# EAGLE board PIC32board (EAGLE 8.1.0)
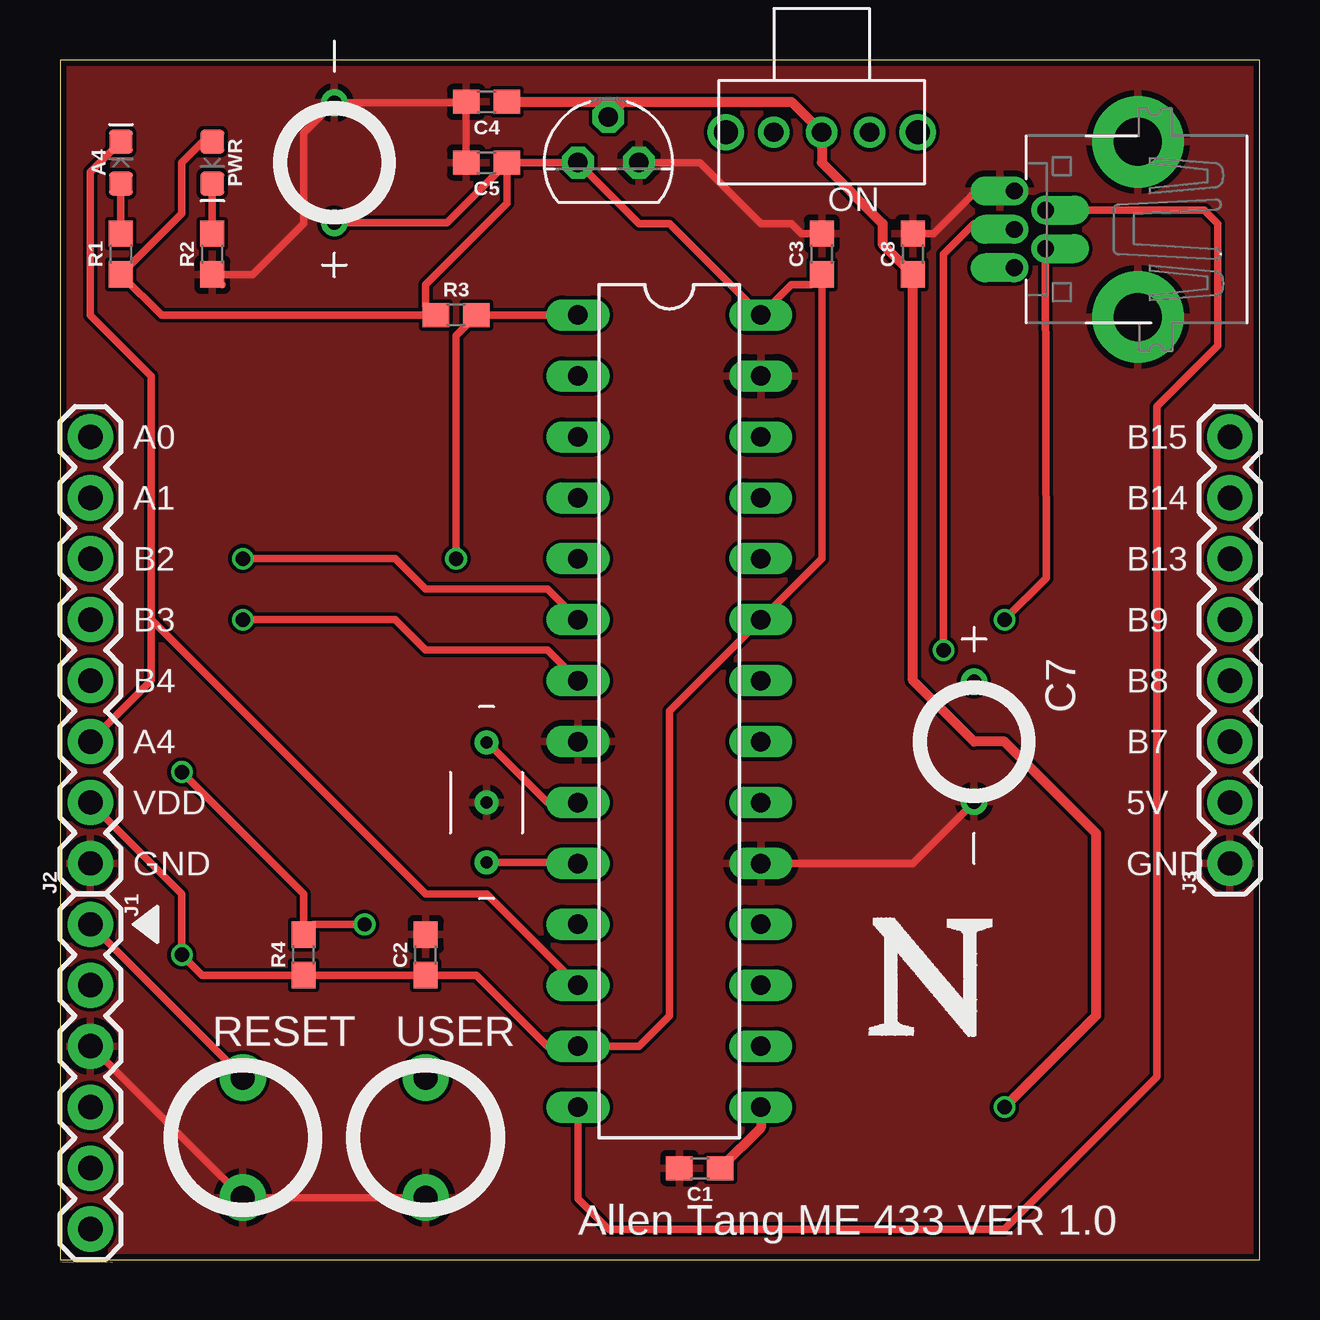
[diagram p0: board, top side]
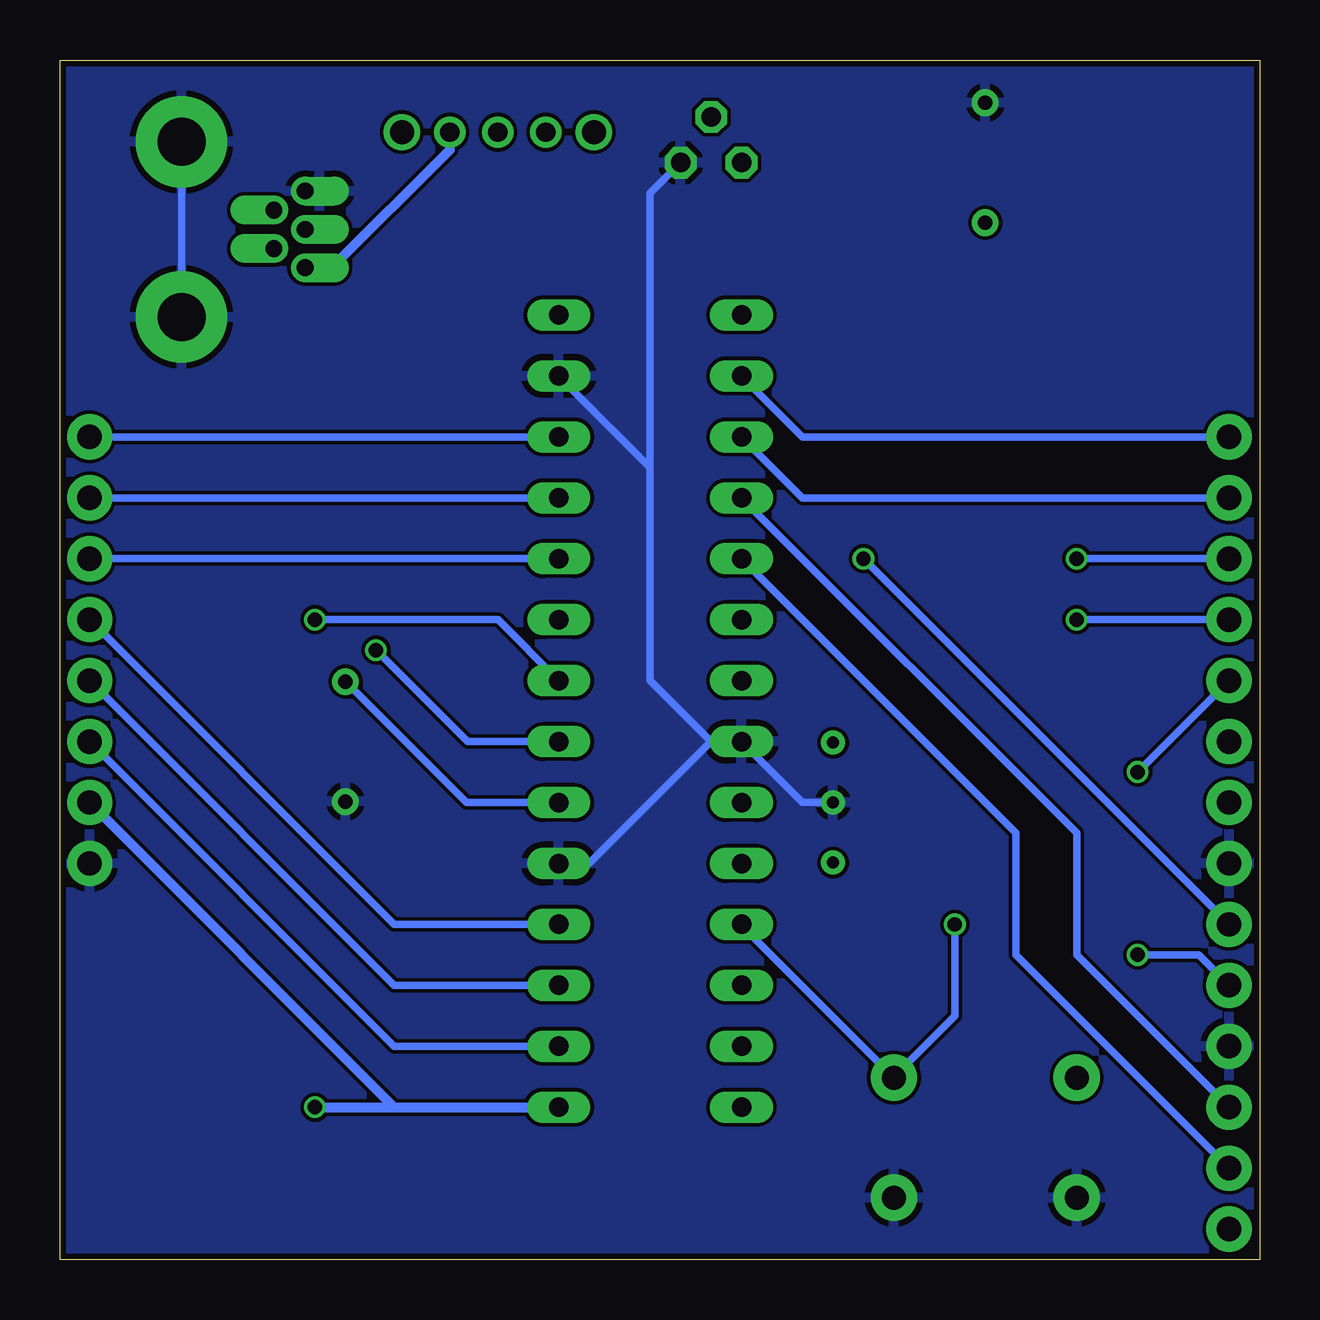
[diagram p1: board, bottom side, seen from below]

Size 50 x 50 mm. Coordinates in mm from the lower left corner, seen from the top.
Outline: 0,0 50,0 50,50 0,50 0,0
Copper layers (1*16): Top 0.035mm / dielectric 1.5mm / Bottom 0.035mm
Design rules "SeeedStudio_2layer_DRU_no_angle_20140221": minimum track width 6mil, minimum drill 12mil, track to track 6mil, track to pad 6mil, pad to pad 6mil, via to via 6mil, smd to smd 0mil, copper to edge 10mil, drill to drill 10mil, minimum pad ring 10mil, minimum via ring 6mil, stop-mask expansion 2mil, vias tented up to drill 100mil, thermal gap 10mil

## Footprints (pad centres in the part's own frame; a part is rotated, then mirrored left to right if it is on the bottom)
LED-0603 = smd 1 x 1: A -0.877,0; C 0.877,0
0603 = smd 1.1 x 1: 1 -0.85,0; 2 0.85,0
10µF_THROUGHHOLE = drill 0.6: NEG 2.5,0; POS -2.5,0
1X06 = drill 1.016 pad 1.88: 1 0,0; 2 2.54,0; 3 5.08,0; 4 7.62,0; 5 10.16,0; 6 12.7,0
1X08 = drill 1.016 pad 1.88: 1 0,0; 2 2.54,0; 3 5.08,0; 4 7.62,0; 5 10.16,0; 6 12.7,0; 7 15.24,0; 8 17.78,0
BTN = drill 1 pad 1.93: 1 -2.5,0; 2 2.5,0
DIP28 = drill 0.813 long: 1 -17.78,-3.81; 2 -15.24,-3.81; 3 -12.7,-3.81; 4 -10.16,-3.81; 5 -7.62,-3.81; 6 -5.08,-3.81; 7 -2.54,-3.81; 8 0,-3.81; 9 2.54,-3.81; 10 5.08,-3.81; 11 7.62,-3.81; 12 10.16,-3.81; 13 12.7,-3.81; 14 15.24,-3.81; 15 15.24,3.81; 16 12.7,3.81; 17 10.16,3.81; 18 7.62,3.81; 19 5.08,3.81; 20 2.54,3.81; 21 0,3.81; 22 -2.54,3.81; 23 -5.08,3.81; 24 -7.62,3.81; 25 -10.16,3.81; 26 -12.7,3.81; 27 -15.24,3.81; 28 -17.78,3.81
TO92 = drill 0.813 octagon: GND 1.27,0; VIN 0,1.905; VOUT -1.27,0
8MHZ-CRYSTAL = drill 0.5: 1 -2.5,0; 2 0,0; 3 2.5,0
SLIDE-SWITCH = drill 0.8: 1 -2,0; 2 2,0; 3 0,0 | drill 1: NC1 -4,0; NC2 4,0
USB-MINIB-THM-MOLEX = drill 0.7 offset: D+ 0,9.72; D- -0.8,8.42; GND 1.6,9.72; ID 0.8,8.42; VBUS -1.6,9.72 | drill 2 pad 3.81: GND1 -3.65,4.57; GND4 3.65,4.57

## Placement (x,y rotation side)
A4  GREEN  [LED-0603]  2.54,45.72 90 top
C1  0.1µF-SMD  [0603]  26.67,3.81 180 top
C2  0.1µF-SMD  [0603]  15.24,12.7 90 top
C3  0.1µF-SMD  [0603]  31.75,41.91 90 top
C4  0.1µF-SMD  [0603]  17.78,48.26 180 top
C5  0.1µF-SMD  [0603]  17.78,45.72 180 top
C6  10µF-POL  [10µF_THROUGHHOLE]  11.43,45.72 90 top
C7  10µF-POL  [10µF_THROUGHHOLE]  38.1,21.59 270 top
C8  0.1µF-SMD  [0603]  35.56,41.91 90 top
J1  [1X06]  1.27,13.97 270 top
J2  [1X08]  1.27,16.51 90 top
J3  [1X08]  48.77,16.51 90 top
PWR  RED  [LED-0603]  6.35,45.72 270 top
R1  330  [0603]  2.54,41.91 90 top
R2  330  [0603]  6.35,41.91 90 top
R3  10KOHM-SMD  [0603]  16.51,39.37 0 top
R4  10KOHM-SMD  [0603]  10.16,12.7 90 top
RESET  BTN  [BTN]  7.62,5.08 270 top
U$1  PIC32MX250F128B_SOCKET  [DIP28]  25.4,21.59 270 top
U$2  MCP1702  [TO92]  22.86,45.72 0 top
U$8  8MHZ-CRYSTAL  [8MHZ-CRYSTAL]  17.78,19.05 270 top
U$16  SLIDE-SWITCH  [SLIDE-SWITCH]  31.75,46.99 180 top
U$17  USB-B  [USB-MINIB-THM-MOLEX]  49.5,42.94 90 top
USER  BTN  [BTN]  15.24,5.08 270 top

## Library data of the parts
A4 = me433; PROD_ID: DIO-00821
C1-C8 R3 R4 RESET U$1 U$2 U$8 U$16 U$17 USER = me433
J1 = me433; PROD_ID: CONN-08437
J2 J3 = me433; PROD_ID: CONN-08438
PWR = me433; PROD_ID: DIO-00819
R1 R2 = me433; PROD_ID: RES-00818

## Nets
5V: C1.1 C4.1 C8.1 J3.2 U$1.15 U$2.VIN U$16.3
A0: J2.8 U$1.2
A1: J2.7 U$1.3
A4: A4.C J2.3 U$1.12
B2: J2.6 U$1.6
B3: J2.5 U$1.7
B4: J2.4 R4.2 U$1.11 USER.1
B7: J3.3 U$1.16
B8: J3.4 U$1.17
B9: J3.5 U$1.18
B13: J3.6 U$1.24
B14: J3.7 U$1.25
B15: J3.8 U$1.26
D+: U$1.21 U$17.D+
D-: U$1.22 U$17.D-
GND: C1.2 C2.2 C3.2 C4.2 C5.2 C6.NEG C7.NEG C8.2 J1.3 J2.1 J3.1 R2.1 RESET.2 U$1.8 U$1.19 U$1.27 U$2.GND U$8.2 U$17.GND U$17.GND1 U$17.GND4 USER.2
ID: U$1.14 U$17.ID
MCLR: J1.1 R3.2 RESET.1 U$1.1
N$1: PWR.C R2.2
N$2: A4.A R1.2
NC3: J1.6
OSC1: U$1.9 U$8.1
OSC2: U$1.10 U$8.3
PGEC1: J1.5 U$1.5
PGED1: J1.4 U$1.4
VBUS: U$16.1 U$17.VBUS
VCAP: C7.POS U$1.20
VDD: C2.1 C3.1 C5.1 C6.POS J1.2 J2.2 PWR.A R1.1 R3.1 R4.1 U$1.13 U$1.23 U$1.28 U$2.VOUT

## Tracks (layer width: path | path; a pad name or v marks a point on that pad's centre or on a via)
5V  (via drill 0.6)
  Top 0.406: C4.1 23.5,48.26 | 23.5,48.26 30.48,48.26 U$16.3 31.75,45.72 34.29,43.18 34.29,42.33 C8.1 35.56,24.13 38.1,21.59 39.37,21.59 43.18,17.78 43.18,10.16 v39.37,6.35 | U$1.15 29.21,5.5 C1.1 | 23.5,48.26 U$2.VIN
  Bottom 0.406: 36.07,6.35 U$1.15 | 36.07,6.35 J3.2 | v39.37,6.35 36.07,6.35
A0
  Bottom 0.305: J2.8 19.05,34.29 U$1.2
A1
  Bottom 0.305: J2.7 19.05,31.75 U$1.3
A4
  Top 0.305: 3.81,26.67 3.81,36.83 1.27,39.37 1.27,45.33 A4.C | 3.81,26.67 3.81,24.13 J2.3 | U$1.12 17.78,15.24 15.24,15.24 3.81,26.67
B2  (via drill 0.6)
  Top 0.305: v7.62,29.21 13.97,29.21 15.24,27.94 20.32,27.94 U$1.6
  Bottom 0.305: J2.6 v7.62,29.21
B3  (via drill 0.6)
  Top 0.305: v7.62,26.67 13.97,26.67 15.24,25.4 20.32,25.4 U$1.7
  Bottom 0.305: J2.5 v7.62,26.67
B4  (via drill 0.6)
  Top 0.305: v12.7,13.97 10.58,13.97 R4.2 10.16,15.24 v5.08,20.32
  Bottom 0.305: U$1.11 21.59,13.93 USER.1 15.24,7.62 12.7,10.16 v12.7,13.97 | v5.08,20.32 J2.4
B7
  Bottom 0.305: U$1.16 36.07,8.89 J3.3
B8
  Bottom 0.305: U$1.17 36.07,11.43 J3.4
B9
  Bottom 0.305: U$1.18 36.07,13.97 J3.5
B13
  Bottom 0.305: J3.6 U$1.24
B14
  Bottom 0.305: J3.7 U$1.25
B15
  Bottom 0.305: J3.8 U$1.26
D+  (via drill 0.6)
  Top 0.305: v36.83,25.4 36.83,41.91 38.1,43.18 39.54,43.18 U$17.D+
  Bottom 0.305: U$1.21 33.02,21.59 v36.83,25.4
D-  (via drill 0.6)
  Top 0.305: U$17.D- 41.11,28.41 v39.37,26.67
  Bottom 0.305: v39.37,26.67 31.75,26.67 U$1.22
GND
  Top 0.305: C7.NEG 38.1,19.05 35.56,16.51 U$1.19 | 6.77,40.64 R2.1 8.04,41.06 10.16,43.18 10.16,46.95 C6.NEG 16.51,48.22 | J1.3 1.31,8.89 RESET.2 USER.2 | 16.51,48.22 16.89,48.22 | C5.2 16.93,47.8 16.51,48.22 | C3.2 30.9,42.76 30.48,43.18 29.21,43.18 26.67,45.72 U$2.GND | C8.2 36.41,42.76 38.1,44.45 39.69,44.45 U$17.GND
  Bottom 0.305: U$8.2 19.05,19.05 U$1.8 22.86,21.59 | U$17.GND1 U$17.GND4 | U$1.19 27.94,16.51 22.86,21.59 | 22.86,21.59 25.4,24.13 25.4,33.02 | 25.4,33.02 U$1.27 | U$2.GND 25.4,44.45 25.4,33.02
  pour Top: 0,50.8 50.8,50.8 50.8,0 0,0
  pour Bottom: 0,50.8 50.8,50.8 50.8,0 0,0
ID
  Top 0.305: U$1.14 21.59,2.54 22.86,1.27 39.37,1.27 45.72,7.62 45.72,35.56 48.26,38.1 48.26,43.18 47.7,43.74 U$17.ID
MCLR  (via drill 0.6)
  Top 0.305: U$1.1 R3.2 16.51,38.52 v16.51,29.21 | RESET.1 7.62,7.62 J1.1
  Bottom 0.305: J1.1 v16.51,29.21
N$1
  Top 0.305: PWR.C R2.2
N$2
  Top 0.305: A4.A R1.2
OSC1
  Top 0.305: U$8.1 17.82,21.55 20.32,19.05 U$1.9
OSC2
  Top 0.305: U$8.3 21.55,16.55 U$1.10
PGEC1
  Bottom 0.305: J1.5 10.16,12.7 10.16,17.78 U$1.5
PGED1
  Bottom 0.305: J1.4 7.62,12.7 7.62,17.78 U$1.4
VBUS
  Bottom 0.406: U$16.1 33.75,46.26 38.67,41.34 U$17.VBUS
VCAP
  Bottom 0.305: U$1.20 33.06,19.05 C7.POS
VDD  (via drill 0.6)
  Top 0.305: PWR.A 5.96,46.6 5.08,45.72 5.08,43.6 R1.1 4.23,39.37 R3.1 15.24,39.79 15.24,40.64 18.63,44.03 C5.1 | J2.2 5.08,15.24 v5.08,12.7 5.93,11.85 R4.1 C2.1 17.36,11.85 20.32,8.89 U$1.13 24.13,8.89 25.4,10.16 25.4,22.86 U$1.23 31.75,29.21 C3.1 31.33,40.64 30.48,40.64 U$1.28 25.4,43.18 24.13,43.18 U$2.VOUT C5.1 | C6.POS 16.13,43.22 C5.1
  Bottom 0.305: v5.08,12.7 2.54,12.7 J1.2

## Text on the board
tPlace: ON | A0 | B15 | A1 | B14 | B2 | B13 | B3 | B9 | B4 | B8 | A4 | B7 | VDD | 5V | GND | GND | Allen Tang ME 433 VER 1.0 | /Users/allentang1996/Downloads/northwestern-uni-logo.bmp
200bmp: /Users/allentang1996/Documents/Northwestern/Junior/NUSpring2017/ME 433/northwestern-uni-logo.bmp